# EAGLE board Core Layout (EAGLE 9.6.2)
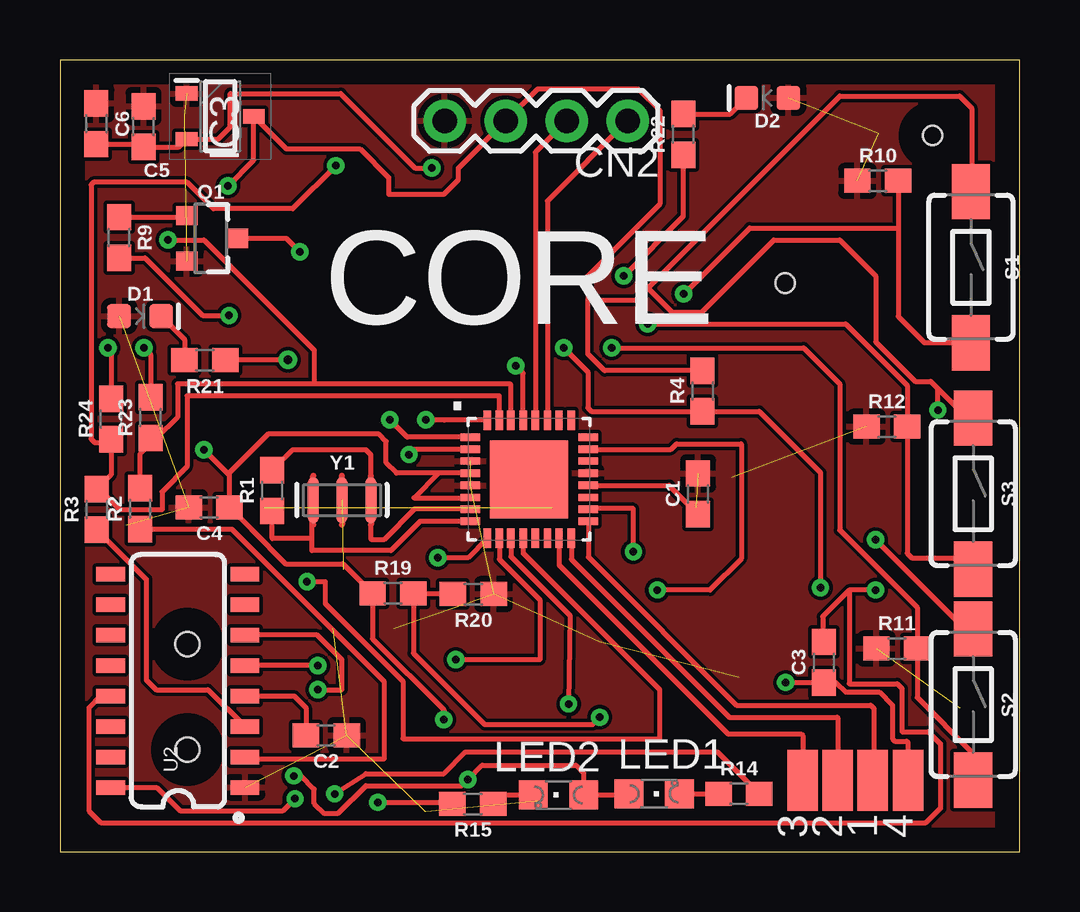
[diagram p0: board, top side]
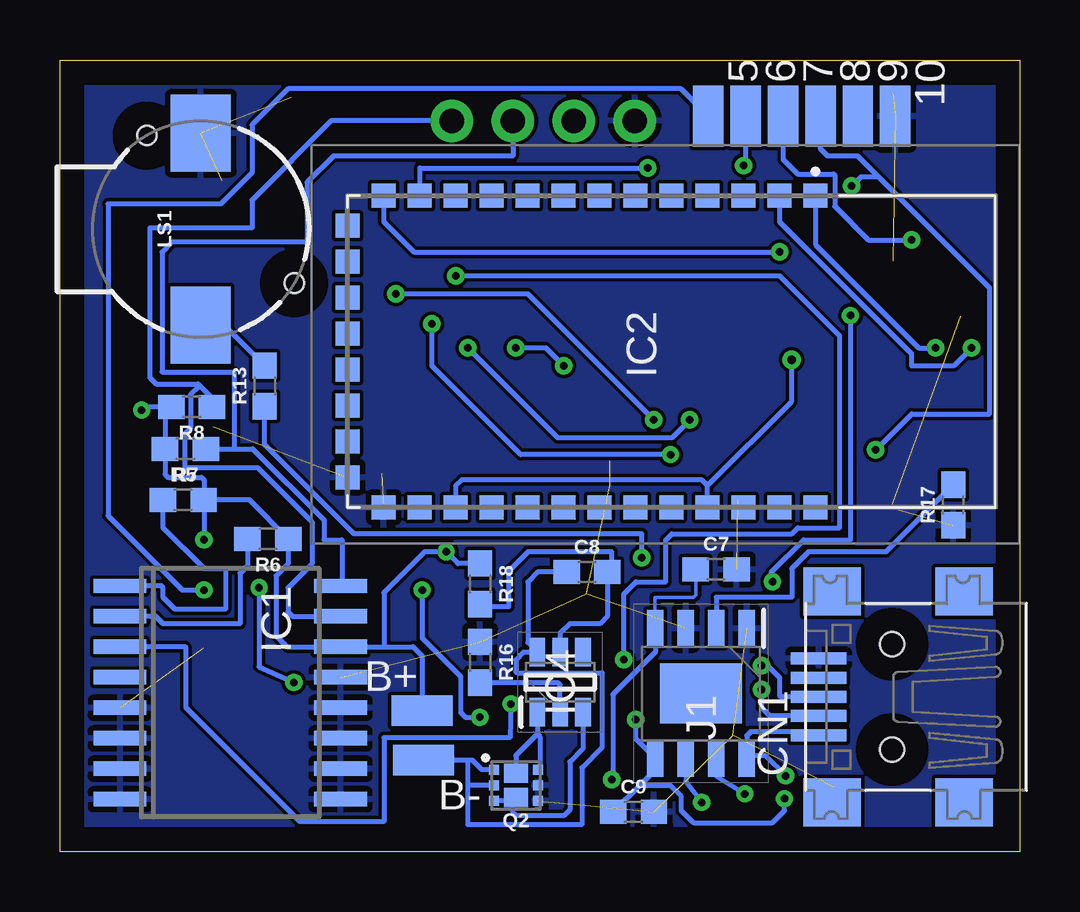
[diagram p1: board, bottom side, seen from below]

Size 40 x 33 mm. Coordinates in mm from the lower left corner, seen from the top.
Outline: 0,0 40,0 40,33 0,33 0,0
Copper layers (1*16): Top 0.035mm / dielectric 1.5mm / Bottom 0.035mm
Design rules "default": minimum track width 6mil, minimum drill 0.35mm, track to track 6mil, track to pad 6mil, pad to pad 6mil, via to via 6mil, smd to smd 6mil, copper to edge 40mil, drill to drill 6mil, minimum pad ring 10mil, minimum via ring 8mil, stop-mask expansion 4mil, vias tented up to drill 0mil, thermal gap 10mil

## Footprints (pad centres in the part's own frame; a part is rotated, then mirrored left to right if it is on the bottom)
SMD1,27-2,54 = smd 1.27 x 2.54: 1 0,0
0603 = smd 1.1 x 1: 1 -0.85,0; 2 0.85,0
USB-MINIB = smd 0.5 x 2.308: D+ 0,4.064; D- -0.8,4.064; GND 1.6,4.064; ID 0.8,4.064; VBUS -1.6,4.064 | smd 2 x 2.4: GND1 -4.4,-2; GND2 -4.4,3.5; GND3 4.4,3.5; GND4 4.4,-2 | hole 1: -2.2,1; 2.2,1
1X04-BIG = drill 1.016 pad 1.778: 1 0,0; 2 2.54,0; 3 5.08,0; 4 7.62,0
LED-0603 = smd 1 x 1: A -0.877,0; C 0.877,0
SO16W = smd 0.6 x 2.2: 1 -4.445,-4.6; 2 -3.175,-4.6; 3 -1.905,-4.6; 4 -0.635,-4.6; 5 0.635,-4.6; 6 1.905,-4.6; 7 3.175,-4.6; 8 4.445,-4.6; 9 4.445,4.6; 10 3.175,4.6; 11 1.905,4.6; 12 0.635,4.6; 13 -0.635,4.6; 14 -1.905,4.6; 15 -3.175,4.6; 16 -4.445,4.6
BLUETOOTHSERIALHC06 = smd 1 x 1: 1 -6.2,6.25; 2 -6.2,4.75; 3 -6.2,3.25; 4 -6.2,1.75; 5 -6.2,0.25; 6 -6.2,-1.25; 7 -6.2,-2.75; 8 -6.2,-4.25; 9 -6.2,-5.75; 10 -6.2,-7.25; 11 -6.2,-8.75; 12 -6.2,-10.25; 13 -6.2,-11.75; 14 -4.95,-13.25; 15 -3.45,-13.25; 16 -1.95,-13.25; 17 -0.45,-13.25; 18 1.05,-13.25; 19 2.55,-13.25; 20 4.05,-13.25; 21 5.55,-13.25; 22 6.8,-11.75; 23 6.8,-10.25; 24 6.8,-8.75; 25 6.8,-7.25; 26 6.8,-5.75; 27 6.8,-4.25; 28 6.8,-2.75; 29 6.8,-1.25; 30 6.8,0.25; 31 6.8,1.75; 32 6.8,3.25; 33 6.8,4.75; 34 6.8,6.25
SOT95P280X130-3N = smd 0.9 x 0.6: 1 -1.4,0.95; 2 -1.4,-0.95; 3 1.4,0
SOT95P280X135-6N = smd 1.2 x 0.65: 1 -1.25,0.95; 2 -1.25,0; 3 -1.25,-0.95; 4 1.25,-0.95; 5 1.25,0; 6 1.25,0.95
SOIC127P600X175-9N = smd 1.525 x 0.7: 1 -2.712,1.905; 2 -2.712,0.635; 3 -2.712,-0.635; 4 -2.712,-1.905; 5 2.712,-1.905; 6 2.712,-0.635; 7 2.712,0.635; 8 2.712,1.905 | smd 2.513 x 3.402: 9 0,0
CHIPLED_0805 = smd 1.2 x 1.2: A 0,-1.05; C 0,1.05
BUZZER-CCV = smd 3.2 x 2.5: + 4,0; - -4,0 | hole 0.8: -3.9,-2.25; 2.25,3.9
SOT23-3 = smd 0.8 x 0.9: 1 -0.95,-1; 2 0.95,-1; 3 0,1.1
MICROFET_2X2 = smd 0.8 x 1: D1 0.5,0; D2 -0.5,0 | smd 0.42 x 0.42: D1_2 0.65,-0.915; D2_2 -0.65,0.915; G1 0,0.915; G2 0,-0.915; S1 0.65,0.915; S2 -0.65,-0.915
TACTILE_SWITCH_SMD_6.0X3.5MM = smd 2.3 x 1.6: 1 -3.15,0; 2 3.15,0
QFN50P500X500X100-33N = smd 0.813 x 0.305: 1 -2.464,1.753; 2 -2.464,1.245; 3 -2.464,0.762; 4 -2.464,0.254; 5 -2.464,-0.254; 6 -2.464,-0.762; 7 -2.464,-1.245; 8 -2.464,-1.753; 17 2.464,-1.753; 18 2.464,-1.245; 19 2.464,-0.762; 20 2.464,-0.254; 21 2.464,0.254; 22 2.464,0.762; 23 2.464,1.245; 24 2.464,1.753 | smd 0.305 x 0.813: 9 -1.753,-2.464; 10 -1.245,-2.464; 11 -0.762,-2.464; 12 -0.254,-2.464; 13 0.254,-2.464; 14 0.762,-2.464; 15 1.245,-2.464; 16 1.753,-2.464; 25 1.753,2.464; 26 1.245,2.464; 27 0.762,2.464; 28 0.254,2.464; 29 -0.254,2.464; 30 -0.762,2.464; 31 -1.245,2.464; 32 -1.753,2.464 | smd 3.251 x 3.251: 33 0,0
SO016 = smd 0.6 x 1.2: 1 -4.445,-2.8; 2 -3.175,-2.8; 3 -1.905,-2.8; 4 -0.635,-2.8; 5 0.635,-2.8; 6 1.905,-2.8; 7 3.175,-2.8; 8 4.445,-2.8; 9 4.445,2.8; 10 3.175,2.8; 11 1.905,2.8; 12 0.635,2.8; 13 -0.635,2.8; 14 -1.905,2.8; 15 -3.175,2.8; 16 -4.445,2.8
RESONATOR-SMD-3.2X1.3 = smd 0.45 x 1.905: 1 -1.2,0; 2 0,0; 3 1.2,0

## Placement (x,y rotation side)
1  [SMD1,27-2,54]  33.88,2.97 0 top
2  [SMD1,27-2,54]  32.42,2.97 0 top
3  [SMD1,27-2,54]  30.96,2.97 0 top
4  [SMD1,27-2,54]  35.35,2.97 0 top
5  [SMD1,27-2,54]  12.98,30.66 180 bottom
6  [SMD1,27-2,54]  11.42,30.66 180 bottom
7  [SMD1,27-2,54]  9.86,30.66 180 bottom
8  [SMD1,27-2,54]  8.3,30.66 180 bottom
9  [SMD1,27-2,54]  6.74,30.66 180 bottom
10  [SMD1,27-2,54]  5.18,30.66 180 bottom
B+  [SMD1,27-2,54]  24.91,5.88 270 bottom
B-  [SMD1,27-2,54]  24.84,3.81 90 bottom
C1  0.1uF  [0603]  26.6,14.91 90 top
C2  100n  [0603]  11.1,4.85 180 top
C3  0.1uF  [0603]  31.85,7.89 90 top
C4  0.1uF  [0603]  6.22,14.35 180 top
C5  [0603]  3.48,30.22 90 top
C6  [0603]  1.52,30.34 270 top
C7  [0603]  12.65,11.77 0 bottom
C8  100nF  [0603]  18.03,11.65 0 bottom
C9  10uf  [0603]  16.09,1.65 0 bottom
CN1  [USB-MINIB]  4.31,6.45 90 bottom
CN2  1X4-BIG  [1X04-BIG]  23.66,30.46 180 top
D1  [LED-0603]  3.34,22.32 0 top
D2  [LED-0603]  29.49,31.42 180 top
IC1  DS3231/SO  [SO16W]  32.9,6.63 270 bottom
IC2  BLUETOOTH-SERIAL-HC-06  [BLUETOOTHSERIALHC06]  14.76,21.15 270 bottom
IC3  [SOT95P280X130-3N]  6.68,30.65 0 top
IC4  DW01A-G  [SOT95P280X135-6N]  19.15,7.06 90 bottom
J1  TP4056  [SOIC127P600X175-9N]  13.28,6.59 270 bottom
LED1  [CHIPLED_0805]  24.77,2.41 270 top
LED2  [CHIPLED_0805]  20.78,2.36 90 top
LS1  BUZZER-SMD  [BUZZER-CCV]  34.13,25.95 270 bottom
Q1  220mA/50V/3.5Ω  [SOT23-3]  6.29,25.56 270 top
Q2  5A/20V/54mΩ  [MICROFET_2X2]  20.99,2.76 90 bottom
R1  1M  [0603]  8.85,15.05 90 top
R2  1k  [0603]  3.35,14.29 90 top
R3  1k  [0603]  1.54,14.26 90 top
R4  10k  [0603]  26.79,19.2 90 top
R5  51k  [0603]  34.86,14.66 0 bottom
R6  0  [0603]  31.33,13.04 180 bottom
R7  51k  [0603]  34.77,16.79 180 bottom
R8  51k  [0603]  34.51,18.54 180 bottom
R9  1k  [0603]  2.46,25.6 270 top
R10  2k  [0603]  34.09,27.96 0 top
R11  2k  [0603]  34.88,8.46 0 top
R12  2k  [0603]  34.47,17.71 0 top
R13  0  [0603]  31.46,19.41 90 bottom
R14  1k  [0603]  28.3,2.41 0 top
R15  1k  [0603]  17.21,1.99 180 top
R16  1k  [0603]  22.48,7.89 270 bottom
R17  1.20k  [0603]  2.77,14.45 90 bottom
R18  100  [0603]  22.48,11.16 270 bottom
R19  6.8k  [0603]  13.88,10.77 0 top
R20  2.2k  [0603]  17.23,10.73 180 top
R21  1K  [0603]  6.04,20.48 180 top
R22  1k  [0603]  25.98,29.9 90 top
R23  0  [0603]  3.78,18.09 90 top
R24  0  [0603]  2.13,18.03 90 top
S1  [TACTILE_SWITCH_SMD_6.0X3.5MM]  37.97,24.36 270 top
S2  [TACTILE_SWITCH_SMD_6.0X3.5MM]  38.07,6.13 270 top
S3  [TACTILE_SWITCH_SMD_6.0X3.5MM]  38.07,14.92 270 top
U1  ATMEGA328P-MU  [QFN50P500X500X100-33N]  19.56,15.52 0 top
U2  CH340C  [SO016]  4.91,7.12 90 top
Y1  16MHz  [RESONATOR-SMD-3.2X1.3]  11.76,14.65 0 top

## Library data of the parts
1-10 B+ B- = wirepad
C1-C9 = SparkFun-Capacitors; PROD_ID: CAP-07880
CN1 CN2 IC1 LED1 LED2 = adafruit
D1 D2 = SparkFun-LED
IC2 = BLUETOOTH-SERIAL-HC-06; DESCRIPTION: Bluetooth / 802.15.1 Modules BLUETOOTH-SERIAL-HC-06; HEIGHT: 2mm; MANUFACTURER_NAME: Olimex Ltd.; MANUFACTURER_PART_NUMBER: BLUETOOTH-SERIAL-HC-06; MOUSER_PART_NUMBER: 909-BLE-SERIAL-HC-06; MOUSER_PRICE-STOCK: https://www.mouser.co.uk/ProductDetail/Olimex-Ltd/BLUETOOTH-SERIAL-HC-06?qs=tMOYG%252Bw4%252BLzhaOkVjDuAYw%3D%3D
IC3 = XC6206P332MR; DESCRIPTION: Low ESR Cap.Compatible Postive Voltage Regulators; HEIGHT: 1.3mm; MANUFACTURER_NAME: Torex; MANUFACTURER_PART_NUMBER: XC6206P332MR
IC4 = DW01A-G; DESCRIPTION: One Cell Lithium-ion/Polymer Battery Protection IC; HEIGHT: 1.35mm; MANUFACTURER_NAME: Fortune Semiconductor Corporation; MANUFACTURER_PART_NUMBER: DW01A-G
J1 = TP4056; DESCRIPTION: 1A Standalone Linear Li-lon Battery Charger, SOP-8; HEIGHT: 1.75mm; MANUFACTURER_NAME: NanJing Top Power; MANUFACTURER_PART_NUMBER: TP4056
LS1 = SparkFun-Electromechanical; PROD_ID: COMP-08568
Q1 = SparkFun-DiscreteSemi; PROD_ID: TRANS-00830
Q2 = SparkFun-DiscreteSemi; PROD_ID: TRANS-09516
R1-R24 = SparkFun-Resistors; PROD_ID: RES-08413
S1-S3 = SparkFun-Switches; PROD_ID: SWCH-14278; SF_SKU: COM-08229
U1 = Ava; MPN: ATMEGA328P-MU; OC_FARNELL: 1748522; OC_NEWARK: 26R2526; PACKAGE: QFN-32; SUPPLIER: Atmel
U2 = SparkFun-IC-Comms; PROD_ID: IC-14038
Y1 = SparkFun-Clocks; PROD_ID: XTAL-08900

## Nets
3.3V: C5.1 C6.2 IC2.12 IC3.2
ALARM: IC1.3 U1.11
BAT-LED: R22.1 U1.10
BAT-VOL: R19.2 R20.2 U1.23
BOT-BUT: R11.2 S2.2 U1.1
BT-STATE: IC2.24 IC2.31 R21.1
BUZZ: R13.1 U1.9
CTS: 9.1
D+: CN1.D+ U2.5
D-: CN1.D- U2.6
DTR: 5.1 C3.2 U2.13
GND: 10.1 C1.2 C2.1 C4.2 C5.2 C6.1 C7.2 C9.2 CN1.GND CN2.4 D1.A D2.A IC1.5 IC1.6 IC1.7 IC1.8 IC1.9 IC1.10 IC1.11 IC1.12 IC1.13 IC2.21 IC2.22 IC3.1 J1.1 J1.3 LS1.- Q1.2 Q2.G2 Q2.S2 R10.1 R11.1 R12.1 R16.1 R17.1 R20.1 U1.3 U1.5 U1.21 U2.1 Y1.2
MID-BUT: R12.2 S3.2 U1.2
MISO: 2.1 U1.16
MOS: R9.2 U1.12
MOSI: 3.1 U1.15
N$1: C1.1 U1.20
N$2: IC1.1 R5.1
N$3: R1.2 U1.7 Y1.3
N$4: R1.1 U1.8 Y1.1
N$5: IC1.2 R6.2
N$6: IC2.13 Q1.3
N$7: C2.2 U2.4
N$8: R3.1 U2.3
N$9: Q1.1 R9.1
N$10: LS1.+ R13.2
N$11: R2.1 U2.2
N$12: J1.6 R15.2
N$13: LED2.C R15.1
N$14: J1.7 R14.2
N$15: LED1.C R14.1
N$16: C7.1 CN1.VBUS J1.4 J1.8 LED1.A LED2.A
N$17: C8.2 IC4.5 R18.2
N$18: B-.1 C8.1 IC4.6 Q2.G1 Q2.S1
N$19: J1.2 R17.2
N$20: D2.C R22.2
N$21: D1.C R21.2
N$22: IC2.26 IC2.34
N$23: IC4.3 Q2.D2 Q2.D2_2
N$24: IC4.2 R16.2
N$25: IC2.1 R23.2
N$26: IC4.1 Q2.D1 Q2.D1_2
N$27: IC2.2 R24.2
RESET: 4.1 C3.1 R4.1 U1.29
RX: 7.1 R2.2 R23.1 U1.30
SCK: 1.1 U1.17
SCL: CN2.2 IC1.16 R7.1 U1.28
SDA: CN2.1 IC1.15 R8.1 U1.27
TOP-BUT: R10.2 S1.2 U1.32
TX: 6.1 R3.2 R24.1 U1.31
VCC: 8.1 B+.1 C4.1 C9.1 CN2.3 IC1.14 IC3.3 J1.5 R4.2 R5.2 R6.1 R7.2 R8.2 R18.1 R19.1 S1.1 S2.1 S3.1 U1.4 U1.6 U1.18 U2.16

## Tracks (layer width: path | path; a pad name or v marks a point on that pad's centre or on a via)
3.3V  (via drill 0.31 pad 0.61)
  Top 0.2: C6.2 3.36,29.49 C5.1 4.95,29.37 IC3.2 6.6,29.7 7.1,30.2 7.1,31.6 11.7,31.6 14.8,28.5 v15.5,28.5
  Bottom 0.2: IC2.12 25,28.5 v15.5,28.5
ALARM  (via drill 0.31 pad 0.61)
  Top 0.2: U1.11 18.8,12.3 21.25,9.85 v21.2,6.15
  Bottom 0.2: v21.2,6.15 21.25,4.75 26.5,4.75 26.5,1.25 30,1.25 34.75,6 34.75,8.5 34.78,8.54 IC1.3
BAT-LED  (via drill 0.31 pad 0.61)
  Top 0.2: 18.25,12.99 U1.10 18.32,12.19 19.25,11.25 19.5,11 20,10.5 20,8 v16.5,8 | v23.5,24 25.98,26.48 R22.1
  Bottom 0.2: v16.5,8 16.5,10.75 16,11.25 14.75,11.25 14.75,13 14.5,13.25 9.5,13.25 9.25,13.5 7.5,13.5 7.5,21.5 10,24 v23.5,24
BAT-VOL  (via drill 0.31 pad 0.61)
  Top 0.2: R20.2 16.34,10.77 R19.2 14.73,8.27 17.7,5.3 22.2,5.3 v22.5,5.6 | U1.23 25.46,16.77 25.7,17 28.4,17 28.4,12.2 27.1,10.9 v24.9,10.9
  Bottom 0.2: v24.9,10.9 24.9,8.9 23.3,7.3 23.3,5.8 23.1,5.6 v22.5,5.6
BOT-BUT  (via drill 0.31 pad 0.61)
  Top 0.2: S2.2 38.07,4.08 35.73,6.42 R11.2 35.73,10.17 32.5,13.4 32.5,19.5 31,21 v23,21 | U1.1 14.48,17.27 v13.75,18
  Bottom 0.2: v13.75,18 14.5,17.25 19.25,17.25 v23,21
BT-STATE  (via drill 0.35 pad 0.61)
  Top 0.2: v9.5,20.5 6.91,20.5 R21.1
  Bottom 0.2: IC2.31 13.01,15.26 | 13.01,15.26 13.25,15.5 23.25,15.5 23.51,15.24 IC2.24 | 13.01,15.26 9.5,18.77 v9.5,20.5
BUZZ  (via drill 0.31 pad 0.61)
  Top 0.2: U1.9 17,12.25 v15.75,12.25
  Bottom 0.2: R13.1 31.46,16.96 27.75,13.25 15.75,13.25 v15.75,12.25
D+  (via drill 0.31 pad 0.61)
  Top 0.2: v10.75,7.75 v10.74,7.75 U2.5
  Bottom 0.2: CN1.D+ 9.95,6.45 10,6.5 10,7.25 10.5,7.75 v10.75,7.75
D-  (via drill 0.31 pad 0.61)
  Top 0.2: v10.75,6.75 11.75,6.75 11.75,8 10.72,9.03 U2.6
  Bottom 0.2: CN1.D- 10.4,5.65 10.75,6 v10.75,6.75
DTR  (via drill 0.31 pad 0.61)
  Top 0.2: v34,10.9 32.9,10.9 | 32.9,10.9 31.8,9.8 31.8,8.79 C3.2 32.16,8.74 | U2.13 1.69,6.49 1.2,6 1.2,1.7 1.7,1.2 36.1,1.2 36.7,1.8 36.7,4.5 36.2,5 35.1,5 35.1,6.8 34.9,7 32.9,7 32.9,10.9
  Bottom 0.2: 5.1 14.12,31.8 30.5,31.8 32,30.3 32,28.3 33.3,27 38,27 38,14 34.9,10.9 v34,10.9
GND  (19 unrouted)
  pour Top: -2,35 42,35 42,-2 -2,-2
  pour Bottom: -4,37 44,37 44,-4 -4,-4
MID-BUT  (via drill 0.31 pad 0.61)
  Top 0.2: S3.2 37.59,12.25 35.5,12.25 35.32,12.43 R12.2 35.32,19.43 32.75,22 v24.5,22 | U1.2 14.77,16.77 v14.55,16.55
  Bottom 0.2: v14.55,16.55 20.8,16.55 24.5,20.25 v24.5,22
MISO
  Top 0.2: U1.16 21.31,12.19 27.9,5.6 32.4,5.6 32.42,5.58 2.1
MOS  (via drill 0.31 pad 0.61)
  Top 0.2: U1.12 19.31,12.44 25,6.75 25,4.7 14.3,4.7 14.3,7.1 11.06,10.34 11.06,11.25 v10.3,11.25 | v7.05,22.35 5.95,22.35 3.55,24.75 R9.2
  Bottom 0.2: v10.3,11.25 10.35,11.65 9,13 7.05,13 v7.05,22.35
MOSI
  Top 0.2: U1.15 20.8,11.95 27.85,4.9 30.9,4.9 30.96,4.84 3.1
N$1
  Top 0.2: C1.1 25.39,15.27 U1.20
N$2
  Bottom 0.2: R5.1 35.71,13.51 34,11.8 33.1,11.8 33.1,10.1 35.2,10.1 35.7,10.6 35.7,11 35.77,11.07 IC1.1
N$3
  Top 0.2: U1.7 14.78,14.28 13.5,13 13,13 12.96,13.04 Y1.3 12.96,16.54 12.75,16.75 9.7,16.75 R1.2
N$4
  Top 0.2: U1.8 15.02,13.77 13.8,12.55 10.5,12.55 10.5,13.05 | 10.5,13.05 10.5,14.59 Y1.1 | 10.5,13.05 8.85,13.05 R1.1
N$5
  Bottom 0.2: R6.2 32.18,11.92 32.5,11.6 32.5,9.5 35.7,9.5 36.01,9.8 IC1.2
N$6  (via drill 0.31 pad 0.61)
  Top 0.2: v10,25 9.44,25.56 Q1.3
  Bottom 0.2: IC2.13 26.51,26.26 25.25,25 v10,25
N$7
  Top 0.2: U2.4 9.77,6.49 10.25,6 C2.2
N$8
  Top 0.2: R3.1 3.6,11.35 3.6,7.15 4,6.75 6.17,6.75 U2.3
N$9
  Top 0.2: R9.1 5.23,26.45 Q1.1
N$10
  Bottom 0.2: R13.2 33.15,21.95 LS1.+
N$11
  Top 0.2: R2.1 7.16,13.44 13.5,7.1 13.5,3.85 7.8,3.85 U2.2
N$12  (via drill 0.31 pad 0.61)
  Top 0.2: 16.32,1.95 R15.2 16.3,2.05 v13.25,2.05
  Bottom 0.2: J1.6 13.91,2.92 v13.25,2.05
N$13
  Top 0.2: 19.5,2.59 LED2.C 18.43,2.36 R15.1
N$14  (via drill 0.31 pad 0.61)
  Top 0.2: v11.45,2.4 12.75,3.25 16,3.25 16.9,4.15 27.41,4.15 R14.2
  Bottom 0.2: J1.7 12.64,3.15 v11.45,2.4
N$15
  Top 0.2: 27.25,2.61 27.43,2.43 | 27.43,2.43 R14.1 | LED1.C 27.41,2.41 27.43,2.43
N$16  (via drill 0.31 pad 0.61)
  Top 0.2: LED2.A 22.28,1.91 | v9.75,3.15 10.05,3.15 10.6,2.6 10.6,2 11,1.6 11.6,1.6 12.75,2.75 16.75,2.75 v17,3 17.6,3.6 21.5,3.6 21.83,3.27 LED2.A | LED2.A 23.67,2.36 LED1.A
  Bottom 0.152: C7.1 13.5,10.7 13.6,10.6 15.2,10.6 15.2,9.32 J1.4
  Bottom 0.2: J1.4 15.19,8.31 16.95,6.55 16.95,3.05 v17,3 | CN1.VBUS 8.52,5 11.2,5 11.38,4.83 11.38,4 | 11.38,4 J1.8 | v9.75,3.15 10.6,4 11.38,4
N$17
  Bottom 0.2: IC4.5 19.15,9.1 18.75,9.5 17.5,9.5 17.18,9.82 C8.2 17,11.83 17,12.5 20.5,12.5 21,12 21.25,11.75 21.3,11.7 21.3,10.2 22.37,10.2 R18.2
N$18
  Bottom 0.2: 19.03,11.5 C8.1 20.1,11.65 20.5,11.25 20.5,8.71 IC4.6 20.69,8.31 21,8 21,7.5 20.95,7.45 17.4,7.45 17.4,4.35 18.25,3.5 18.25,1.12 23,1.12 23,2.75 | 21.91,2.75 Q2.G1 22.99,2.76 23,2.75 | Q2.S1 22.41,3.41 22.81,3.81 23,3.81 | 23,3.81 B-.1 | 23,2.75 23,3.81
N$19
  Bottom 0.2: R17.2 5.57,12.5 8.8,12.5 9.5,11.8 9.5,10.6 12.64,10.6 J1.2
N$20
  Top 0.2: R22.2 27.94,30.75 D2.C
N$21
  Top 0.2: D1.C 5.19,21.35 R21.2
N$22  (1 unrouted)
N$23
  Bottom 0.2: Q2.D2 21.12,2.12 | 21.12,2.12 21.14,2.11 Q2.D2_2 | IC4.3 18.2,4.3 18.75,3.75 18.75,1.75 19,1.5 21,1.5 21.12,1.62 21.12,2.12
N$24
  Bottom 0.2: IC4.2 19.15,6.95 19.24,7.04 R16.2
N$25  (via drill 0.31 pad 0.61)
  Top 0.2: 3.48,20.98 v3.5,21 3.78,20.72 R23.2
  Bottom 0.2: v3.5,21 4.2,21 8.51,25.31 IC2.1
N$26
  Bottom 0.2: Q2.D1_2 20,3.48 20,4.8 20.1,4.9 | IC4.1 20.1,4.9 | Q2.D1 20.99,4.01 20.1,4.9
N$27  (via drill 0.31 pad 0.61)
  Top 0.2: v2,21 2.13,20.87 R24.2
  Bottom 0.2: IC2.2 10.01,26.26 4.5,20.75 4.5,20.25 2.75,20.25 v2,21
RESET  (via drill 0.31 pad 0.61)
  Top 0.2: 19.25,18.04 U1.29 19.31,19.94 v19,20.25 | v31.7,11 31.7,15.8 29.15,18.35 R4.1 22.15,18.35 22,18.5 22,20 v21,21 | 31.74,7.15 C3.1 | v30.25,7.05 C3.1 | C3.1 32.36,7.04 32.75,6.65 34.15,6.65 34.7,6.1 34.7,4.7 34.8,4.6 35.3,4.6 35.35,4.55 4.1
  Bottom 0.2: v31.7,11 31.7,7.7 v30.25,7.05 | v19,20.25 19.75,21 v21,21
RX  (via drill 0.31 pad 0.61)
  Top 0.2: U1.30 18.8,19.45 18.75,19.5 10.6,19.5 | 10.6,19.5 4.9,19.5 4.9,18.1 4.04,17.24 4,17.24 | 4,17.24 R23.1 | v4.5,25.5 6,25.5 10.6,20.9 10.6,19.5 | R2.2 3.35,16.59 4,17.24
  Bottom 0.2: 7.1 9.86,28.86 9.25,28.25 7.75,28.25 7.7,28.2 7.7,26.9 6.3,25.5 v4.5,25.5
SCK
  Top 0.2: 1.1 33.94,3.02 33.94,5.96 33.8,6.1 28.2,6.1 22.02,12.28 U1.17
SCL
  Top 0.2: CN2.2 19.81,29.15 U1.28
  Bottom 0.2: R7.1 32.75,16.79 | 32.75,16.79 31.96,16.79 29,13.83 29,13 28.25,13 28.25,11.12 IC1.16 | 32.75,16.79 32.75,20 35.75,20 35.75,25 35.35,25.4 29.7,25.4 29.7,27.9 28.6,29 21.12,29 CN2.2
SDA
  Top 0.2: CN2.1 20.32,27.12 U1.27
  Bottom 0.2: IC1.15 30.3,9.8 30.5,10 30.5,11 29.5,12 29.5,13.75 31.75,16 34.75,16 34.8,16.05 34.8,17.4 34.56,17.64 34.56,19.04 34.25,19.35 34.25,19.5 | 34.25,19.5 33.66,18.91 R8.1 | 34.25,19.5 36,19.5 36.25,19.75 36.25,26 32,26 32,27.16 28.7,30.46 CN2.1
TOP-BUT  (via drill 0.31 pad 0.61)
  Top 0.2: R10.2 34.94,26 | 34.94,26 34.94,22.31 36.04,21.21 S1.2 | U1.32 16.02,17.98 | 16.02,17.98 16,18 | 16.02,17.98 15.27,17.98 v15.25,18 | v26,23.25 28.75,26 34.94,26
  Bottom 0.2: v15.25,18 20.5,23.25 v26,23.25
TX  (via drill 0.31 pad 0.61)
  Top 0.2: U1.31 18.32,19 5.3,19 5.3,16.05 4.25,15 4.25,14.25 2.5,14.25 1.64,15.11 R3.2 2.13,15.7 2.13,17.05 | R24.1 2.13,17.05 | v11.5,28.6 9.7,26.8 6.4,26.8 5.3,27.9 1.4,27.9 1.3,27.8 1.3,17.2 1.45,17.05 2.13,17.05
  Bottom 0.2: 6.1 11.42,28.68 v11.5,28.6
VCC  (via drill 0.31 pad 0.61)
  Top 0.2: U1.4 15.77,15.77 | 15.77,15.77 14.75,14.75 17.09,14.75 U1.6 | R4.2 22.7,20.05 22,20.75 22,23 | 22,23 24,23 24.5,23.5 | S1.1 38,27.54 38,31 37.5,31.5 32.5,31.5 24.5,23.5 | 24.5,23.5 25.5,22.5 26.75,22.5 29.75,25.5 32.5,25.5 34,24 34,21.25 35.65,19.6 36.3,19.6 36.6,19.3 | S2.1 37.72,9.28 v34,13 | 7.07,15.68 C4.1 8,13.42 8,13.4 9.4,12 11.8,12 R19.1 13.03,8.87 16,5.9 v16,5.5 | 7.07,15.68 7.07,15.8 8.67,17.4 13.3,17.4 13.6,17.1 13.6,16.2 14.03,15.77 15.77,15.77 | 7.07,15.68 v6,16.75 | v23.9,12.5 23.9,14.3 22.05,14.3 U1.18 | S3.1 37.83,18.07 36.6,19.3 | v36.6,18.4 36.6,19.3 | v7,27.75 8.08,28.83 IC3.3 9.43,29.3 12.5,29.3 13.7,28.1 13.7,27.4 16,27.4 16.61,28.01 16.61,28.49 CN2.3 19.92,31.8 24.1,31.8 25,30.9 25,27 22,24 22,23 | U2.16 4.03,2.67 5,1.7 9.3,1.7 v9.8,2.2
  Bottom 0.2: 26.5,8.54 IC1.14 30.54,8.54 31,9 31,11.5 30.48,12.02 R6.1 32.1,14.66 R5.2 | 26.5,8.54 25.29,8.54 24.91,8.16 B+.1 | R5.2 v34,13 | 15.85,2.75 15.19,3.4 J1.5 16,4.69 v16,5.5 | 15.85,2.75 C9.1 | R7.2 35.62,18.28 R8.2 36.46,18.54 v36.6,18.4 | R7.2 35.5,16.67 | v6,16.75 4.5,18.25 1.25,18.25 1.25,23.5 5.88,28.12 | 8.1 8.3,29.3 8,29 6.75,29 5.88,28.12 | 5.88,28.12 6.62,28.12 v7,27.75 | 23.77,12.5 v23.9,12.5 | R7.2 35.62,15.72 35.5,15.6 34.1,15.6 34,15.5 R5.2 | 15.85,2.75 14.54,2.75 14.1,2.3 14.1,1.7 13.6,1.2 10.3,1.2 9.8,1.7 v9.8,2.2 | v23.9,12.5 24.8,12.5 26.5,10.8 26.5,8.54 | R18.1 23.41,12.01 v23.9,12.5

## Text on the board
tNames: CORE